# EAGLE board driver_schnell (EAGLE 5.11)
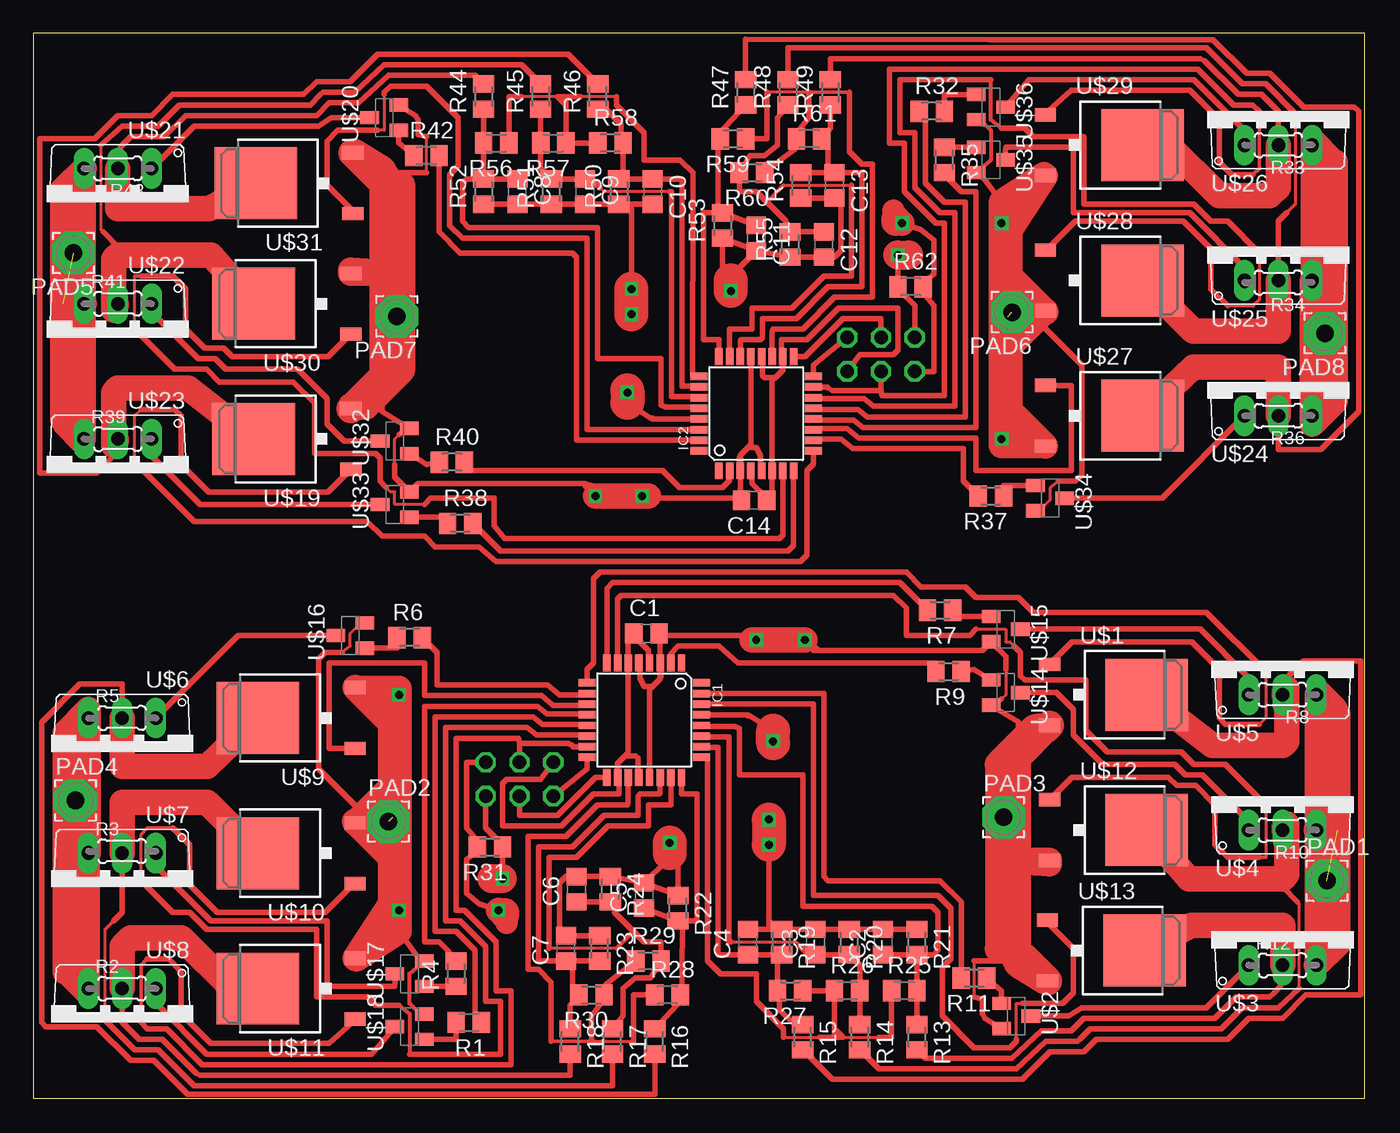
[diagram p0: board, top side]
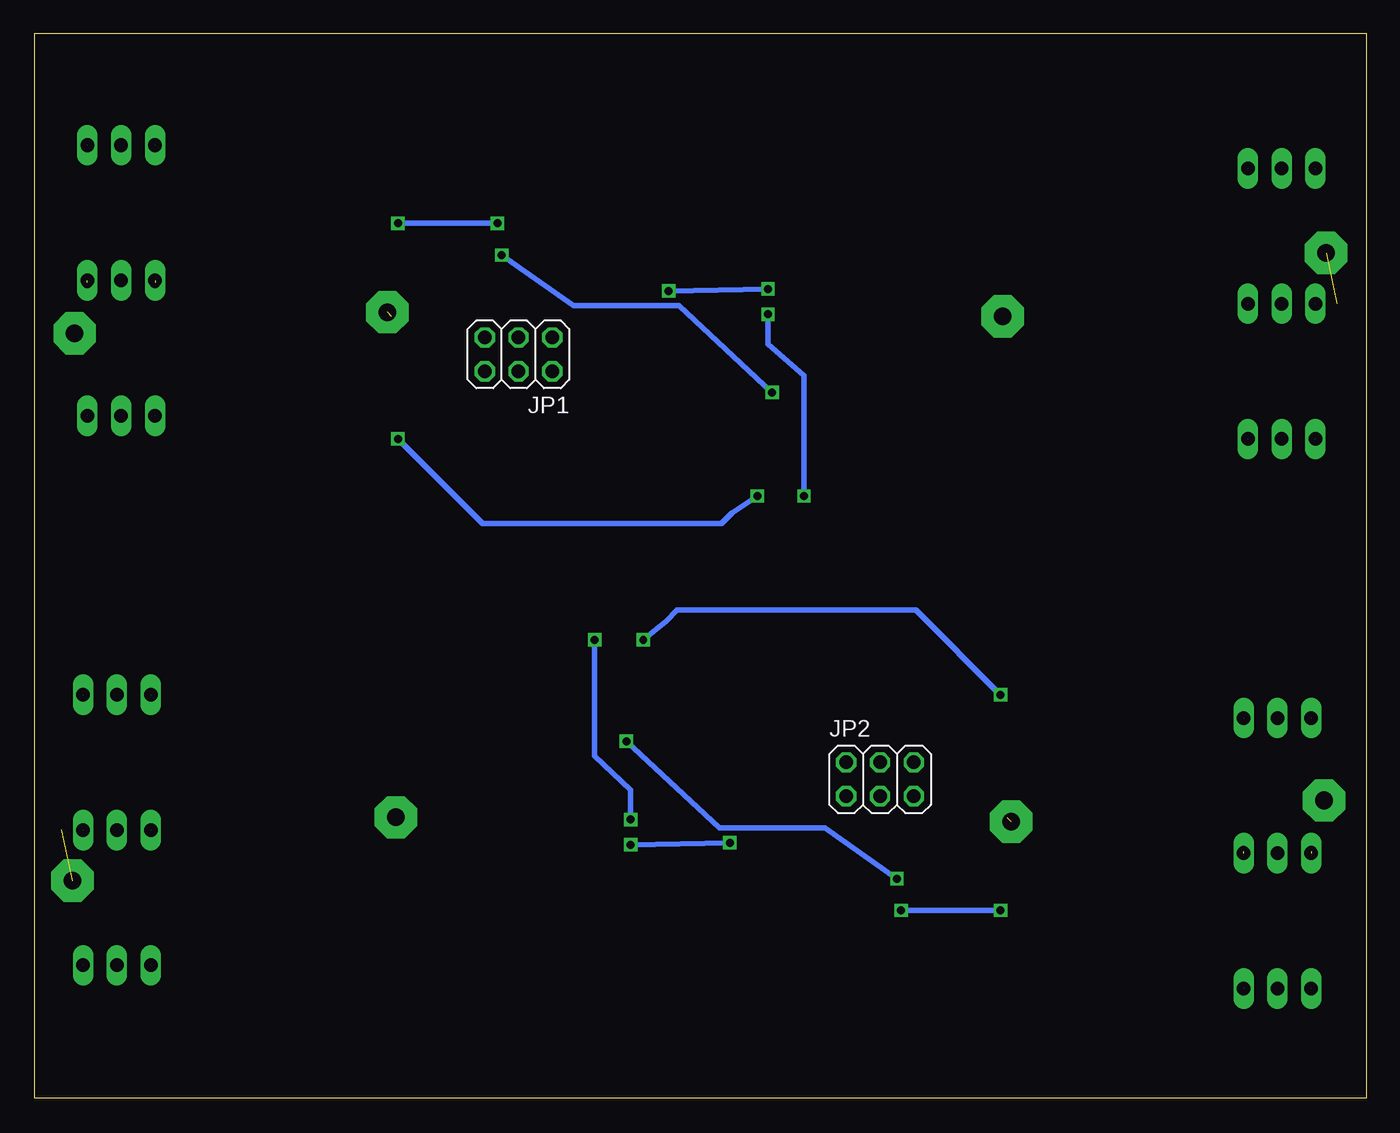
[diagram p1: board, bottom side, seen from below]

Size 100 x 80 mm. Coordinates in mm from the lower left corner, seen from the top.
Outline: 0,0 100,0 100,80 0,80 0,0
Copper layers (1*16): Top 0.035mm / dielectric 1.5mm / Bottom 0.035mm
Design rules "default": minimum track width 10mil, minimum drill 24mil, track to track 8mil, track to pad 8mil, pad to pad 8mil, via to via 8mil, smd to smd 8mil, copper to edge 40mil, drill to drill 8mil, minimum pad ring 10mil, minimum via ring 8mil, stop-mask expansion 4mil, vias tented up to drill 0mil, thermal gap 10mil

## Footprints (pad centres in the part's own frame; a part is rotated, then mirrored left to right if it is on the bottom)
C0805 = smd 1.3 x 1.5: 1 -0.95,0; 2 0.95,0
TQFP32-08 = smd 1.27 x 0.559: 1 -4.293,2.8; 2 -4.293,2; 3 -4.293,1.2; 4 -4.293,0.4; 5 -4.293,-0.4; 6 -4.293,-1.2; 7 -4.293,-2; 8 -4.293,-2.8; 17 4.293,-2.8; 18 4.293,-2; 19 4.293,-1.2; 20 4.293,-0.4; 21 4.293,0.4; 22 4.293,1.2; 23 4.293,2; 24 4.293,2.8 | smd 0.559 x 1.27: 9 -2.8,-4.293; 10 -2,-4.293; 11 -1.2,-4.293; 12 -0.4,-4.293; 13 0.4,-4.293; 14 1.2,-4.293; 15 2,-4.293; 16 2.8,-4.293; 25 2.8,4.293; 26 2,4.293; 27 1.2,4.293; 28 0.4,4.293; 29 -0.4,4.293; 30 -1.2,4.293; 31 -2,4.293; 32 -2.8,4.293
2X03 = drill 1.016 octagon: 1 -2.54,-1.27; 2 -2.54,1.27; 3 0,-1.27; 4 0,1.27; 5 2.54,-1.27; 6 2.54,1.27
3,17/1,3 = drill 1.321 pad 3.175 octagon: 1 0,0
M0805 = smd 1.3 x 1.6: 1 -0.95,0; 2 0.95,0
0204/5 = drill 0.813 octagon: 1 -2.54,0; 2 2.54,0
TO252 = smd 1 x 1.6: 1 -2.28,-4.8; 2 2.28,-4.8 | smd 5.4 x 6.2: 3 0,2.5
SOT23-BEC = smd 1 x 1.4: B -0.95,-1.1; C 0,1.1; E 0.95,-1.1
TO220V = drill 1.016 long: 1 -2.54,-2.54; 2 0,-2.54; 3 2.54,-2.54

## Placement (x,y rotation side)
C1  [C0805]  46.04,34.92 0 top
C2  [C0805]  63.82,11.75 90 top
C3  [C0805]  58.74,11.75 90 top
C4  [C0805]  53.66,11.75 90 top
C5  [C0805]  45.88,15.24 90 top
C6  [C0805]  40.8,15.72 90 top
C7  [C0805]  40.01,11.27 90 top
C8  [C0805]  36.35,68.1 270 top
C9  [C0805]  41.43,68.1 270 top
C10  [C0805]  46.51,68.1 270 top
C11  [C0805]  54.29,64.61 270 top
C12  [C0805]  59.37,64.13 270 top
C13  [C0805]  60.17,68.58 270 top
C14  [C0805]  54.13,44.93 180 top
IC1  MEGA8-AI  [TQFP32-08]  45.88,28.42 270 top
IC2  MEGA8-AI  [TQFP32-08]  54.29,51.44 90 top
JP1  ISP 1  [2X03]  63.66,55.88 180 bottom
JP2  ISP 1  [2X03]  36.51,23.97 0 bottom
PAD1  11,1V_Motor1  [3,17/1,3]  97.16,16.35 0 top
PAD2  GND  [3,17/1,3]  26.67,20.8 0 top
PAD3  GND  [3,17/1,3]  72.87,21.11 0 top
PAD4  11,1V_Motor2  [3,17/1,3]  3.18,22.38 0 top
PAD5  11,1V_Motor1  [3,17/1,3]  3.02,63.5 180 top
PAD6  GND  [3,17/1,3]  73.5,59.05 180 top
PAD7  GND  [3,17/1,3]  27.3,58.74 180 top
PAD8  11,1V_Motor2  [3,17/1,3]  97,57.47 180 top
R1  [M0805]  32.7,5.72 180 top
R2  [0204/5]  6.67,8.26 0 top
R3  [0204/5]  6.67,18.57 0 top
R4  [M0805]  31.75,9.37 90 top
R5  [0204/5]  6.67,28.57 0 top
R6  [M0805]  28.26,34.61 0 top
R7  [M0805]  68.1,36.67 180 top
R8  [0204/5]  93.82,30.32 180 top
R9  [M0805]  68.74,32.07 180 top
R10  [0204/5]  93.82,20.16 180 top
R11  [M0805]  70.64,9.05 180 top
R12  [0204/5]  93.82,10 0 top
R13  4,7k  [M0805]  66.36,4.6 270 top
R14  4,7k  [M0805]  62.07,4.6 270 top
R15  4,7k  [M0805]  57.78,4.6 270 top
R16  4,7k  [M0805]  46.67,4.29 270 top
R17  4,7k  [M0805]  43.5,4.29 270 top
R18  4,7k  [M0805]  40.32,4.29 270 top
R19  1,2k  [M0805]  56.2,11.75 270 top
R20  1,2k  [M0805]  61.28,11.75 270 top
R21  1,2k  [M0805]  66.36,11.75 270 top
R22  1,2k  [M0805]  48.42,14.29 270 top
R23  1,2k  [M0805]  42.55,11.27 270 top
R24  1,2k  [M0805]  43.34,15.72 270 top
R25  1,2k  [M0805]  65.4,8.1 0 top
R26  1,2k  [M0805]  61.12,8.1 0 top
R27  1,2k  [M0805]  56.83,8.1 180 top
R28  1,2k  [M0805]  47.62,7.78 0 top
R29  1,2k  [M0805]  46.2,10.32 0 top
R30  1,2k  [M0805]  41.91,7.78 180 top
R31  [M0805]  34.29,18.89 180 top
R32  [M0805]  67.47,74.14 0 top
R33  [0204/5]  93.5,71.6 180 top
R34  [0204/5]  93.5,61.28 180 top
R35  [M0805]  68.42,70.48 270 top
R36  [0204/5]  93.5,51.28 180 top
R37  [M0805]  71.91,45.24 180 top
R38  [M0805]  32.07,43.18 0 top
R39  [0204/5]  6.35,49.53 0 top
R40  [M0805]  31.43,47.78 0 top
R41  [0204/5]  6.35,59.69 0 top
R42  [M0805]  29.53,70.8 0 top
R43  [0204/5]  6.35,69.85 180 top
R44  4,7k  [M0805]  33.81,75.25 90 top
R45  4,7k  [M0805]  38.1,75.25 90 top
R46  4,7k  [M0805]  42.39,75.25 90 top
R47  4,7k  [M0805]  53.5,75.56 90 top
R48  4,7k  [M0805]  56.67,75.56 90 top
R49  4,7k  [M0805]  59.85,75.56 90 top
R50  1,2k  [M0805]  43.97,68.1 90 top
R51  1,2k  [M0805]  38.89,68.1 90 top
R52  1,2k  [M0805]  33.81,68.1 90 top
R53  1,2k  [M0805]  51.75,65.56 90 top
R54  1,2k  [M0805]  57.63,68.58 90 top
R55  1,2k  [M0805]  56.83,64.13 90 top
R56  1,2k  [M0805]  34.77,71.76 180 top
R57  1,2k  [M0805]  39.05,71.76 180 top
R58  1,2k  [M0805]  43.34,71.75 0 top
R59  1,2k  [M0805]  52.55,72.07 180 top
R60  1,2k  [M0805]  53.97,69.53 180 top
R61  1,2k  [M0805]  58.26,72.07 0 top
R62  [M0805]  65.88,60.96 0 top
U$1  IRLR024  [TO252]  81.12,30.32 270 top
U$2  SMTBA42  [SOT23-BEC]  73.82,6.19 270 top
U$3  IRF9Z34N  [TO220V]  93.82,12.54 0 top
U$4  IRF9Z34N  [TO220V]  93.82,22.7 0 top
U$5  IRF9Z34N  [TO220V]  93.82,32.86 0 top
U$6  IRF9Z34N  [TO220V]  6.67,26.04 180 top
U$7  IRF9Z34N  [TO220V]  6.67,15.88 180 top
U$8  IRF9Z34N  [TO220V]  6.67,5.72 180 top
U$9  IRLR024  [TO252]  19.37,28.58 90 top
U$10  IRLR024  [TO252]  19.37,18.42 90 top
U$11  IRLR024  [TO252]  19.37,8.26 90 top
U$12  IRLR024  [TO252]  81.12,20.16 270 top
U$13  IRLR024  [TO252]  80.96,11.11 270 top
U$14  SMTBA42  [SOT23-BEC]  73.03,30.48 270 top
U$15  SMTBA42  [SOT23-BEC]  73.03,35.24 270 top
U$16  SMTBA42  [SOT23-BEC]  23.81,34.77 90 top
U$17  SMTBA42  [SOT23-BEC]  28.26,9.37 90 top
U$18  SMTBA42  [SOT23-BEC]  28.26,5.4 90 top
U$19  IRLR024  [TO252]  19.05,49.53 90 top
U$20  SMTBA42  [SOT23-BEC]  26.35,73.66 90 top
U$21  IRF9Z34N  [TO220V]  6.35,67.31 180 top
U$22  IRF9Z34N  [TO220V]  6.35,57.15 180 top
U$23  IRF9Z34N  [TO220V]  6.35,46.99 180 top
U$24  IRF9Z34N  [TO220V]  93.5,53.82 0 top
U$25  IRF9Z34N  [TO220V]  93.5,63.98 0 top
U$26  IRF9Z34N  [TO220V]  93.5,74.14 0 top
U$27  IRLR024  [TO252]  80.8,51.28 270 top
U$28  IRLR024  [TO252]  80.8,61.44 270 top
U$29  IRLR024  [TO252]  80.8,71.6 270 top
U$30  IRLR024  [TO252]  19.05,59.69 90 top
U$31  IRLR024  [TO252]  19.21,68.74 90 top
U$32  SMTBA42  [SOT23-BEC]  27.15,49.37 90 top
U$33  SMTBA42  [SOT23-BEC]  27.15,44.61 90 top
U$34  SMTBA42  [SOT23-BEC]  76.36,45.08 270 top
U$35  SMTBA42  [SOT23-BEC]  71.91,70.48 270 top
U$36  SMTBA42  [SOT23-BEC]  71.91,74.45 270 top

## Library data of the parts
C1-C14 R1-R62 = rcl
IC1 IC2 = atmel; MPN: ATMEGA8-16AU; OC_FARNELL: 9171371; OC_NEWARK: 73M8863
JP1 JP2 = pinhead
PAD1-PAD8 = wirepad
U$1 U$3-U$13 U$19 U$21-U$31 = transistor-fet
U$2 U$14-U$18 U$20 U$32-U$36 = transistor-npn

## Nets
+5V: C1.1 IC1.4 IC1.6 IC1.18 IC1.20 JP2.2
+5V1: C14.1 IC2.4 IC2.6 IC2.18 IC2.20 JP1.2
+12V: PAD4.1 R2.1 R3.1 R5.1 U$6.3 U$7.3 U$8.3
+12V1: PAD8.1 R33.1 R34.1 R36.1 U$24.3 U$25.3 U$26.3
GND: C1.2 C2.2 C3.2 C4.2 C5.2 C6.2 C7.2 IC1.3 IC1.5 IC1.21 JP2.6 PAD2.1 PAD3.1 R19.1 R20.1 R21.1 R22.1 R23.1 R24.1 R31.2 U$1.2 U$2.E U$9.2 U$10.2 U$11.2 U$12.2 U$13.2 U$14.E U$15.E U$16.E U$17.E U$18.E
GND1: C8.2 C9.2 C10.2 C11.2 C12.2 C13.2 C14.2 IC2.3 IC2.5 IC2.21 JP1.6 PAD6.1 PAD7.1 R50.1 R51.1 R52.1 R53.1 R54.1 R55.1 R62.2 U$19.2 U$20.E U$27.2 U$28.2 U$29.2 U$30.2 U$31.2 U$32.E U$33.E U$34.E U$35.E U$36.E
N$1: R16.2 U$6.2 U$9.3
N$2: IC1.16 JP2.1
N$3: C5.1 IC1.24 R16.1 R22.2 R28.2
N$4: IC1.15 JP2.4 U$11.1
N$5: IC1.14 U$10.1
N$6: IC1.13 R1.1
N$7: R12.1 U$2.C U$3.1
N$8: R8.2 U$5.1 U$15.C
N$9: R10.2 U$4.1 U$14.C
N$10: R9.1 U$14.B
N$11: C6.1 IC1.23 R17.1 R24.2 R29.2
N$12: C7.1 IC1.22 R18.1 R23.2 R30.2
N$13: R7.1 U$15.B
N$14: IC1.8 R7.2
N$15: IC1.19 R28.1 R29.1 R30.1
N$16: R47.2 U$24.2 U$27.3
N$17: R2.2 U$8.1 U$18.C
N$18: R1.2 U$18.B
N$19: R18.2 U$8.2 U$11.3
N$20: R17.2 U$7.2 U$10.3
N$21: IC1.11 U$9.1
N$22: IC1.12 R4.2
N$23: IC1.10 R6.2
N$24: R13.2 U$3.2 U$13.3
N$25: IC1.9 U$1.1
N$26: R3.2 U$7.1 U$17.C
N$27: IC1.7 U$12.1
N$28: R15.2 U$1.3 U$5.2
N$29: R14.2 U$4.2 U$12.3
N$30: IC1.2 R9.2
N$31: IC1.30 U$13.1
N$32: IC1.31 R11.2
N$33: R4.1 U$17.B
N$34: R5.2 U$6.1 U$16.C
N$35: R6.1 U$16.B
N$36: R11.1 U$2.B
N$37: IC2.15 JP1.4 U$29.1
N$38: IC2.13 R32.1
N$39: IC2.14 U$28.1
N$40: IC1.17 JP2.3
N$41: R49.2 U$26.2 U$29.3
N$42: IC1.29 JP2.5 R31.1
N$43: R48.2 U$25.2 U$28.3
N$44: IC2.11 U$27.1
N$45: R44.2 U$21.2 U$31.3
N$46: IC2.9 U$19.1
N$47: IC2.7 U$30.1
N$48: R46.2 U$19.3 U$23.2
N$49: R45.2 U$22.2 U$30.3
N$50: R43.1 U$20.C U$21.1
N$51: R41.2 U$22.1 U$32.C
N$52: R40.1 U$32.B
N$53: R39.2 U$23.1 U$33.C
N$54: R38.1 U$33.B
N$55: R33.2 U$26.1 U$36.C
N$56: R32.2 U$36.B
N$57: IC2.12 R35.2
N$58: IC2.10 R37.2
N$59: R34.2 U$25.1 U$35.C
N$60: R35.1 U$35.B
N$61: R36.2 U$24.1 U$34.C
N$62: R37.1 U$34.B
N$63: R42.1 U$20.B
N$64: IC2.2 R40.2
N$65: C11.1 IC2.24 R47.1 R53.2 R59.2
N$66: C12.1 IC2.23 R48.1 R55.2 R60.2
N$67: C13.1 IC2.22 R49.1 R54.2 R61.2
N$68: IC2.19 R59.1 R60.1 R61.1
N$69: IC2.29 JP1.5 R62.1
N$70: IC2.16 JP1.1
N$71: IC2.17 JP1.3
N$72: IC2.30 U$31.1
N$73: IC2.31 R42.2
N$74: IC2.8 R38.2
VCC: PAD1.1 R8.1 R10.1 R12.2 U$3.3 U$4.3 U$5.3
VCC1: PAD5.1 R39.1 R41.1 R43.2 U$21.3 U$22.3 U$23.3
VDD: IC1.25 R25.1 R26.1 R27.1
VDD1: IC2.25 R56.1 R57.1 R58.1
VEE: C2.1 IC1.28 R13.1 R21.2 R25.2
VEE1: C8.1 IC2.28 R44.1 R52.2 R56.2
VPP: C3.1 IC1.27 R14.1 R20.2 R26.2
VPP1: C9.1 IC2.27 R45.1 R51.2 R57.2
VSS: C4.1 IC1.26 R15.1 R19.2 R27.2
VSS1: C10.1 IC2.26 R46.1 R50.2 R58.2

## Tracks (layer width: path | path; a pad name or v marks a point on that pad's centre or on a via)
+5V  (via drill 0.6)
  Top 0.406: 44.45,25.72 43.88,25.15 IC1.18 43.97,24.03 43.97,22.86 42.07,22.86 39.69,20.48 35.24,20.48 35.24,23.65 35.56,23.97 38.1,23.97 JP2.2 | 44.45,25.72 45.24,25.72 45.4,25.56 45.4,24.2 IC1.20 | 44.45,25.72 44.68,25.95 IC1.6 44.68,34.52 C1.1 45.09,34.76 46.2,33.66 46.2,32.79 IC1.4 | JP2.2
  other vias: 39.05,25.24
+5V1  (via drill 0.6)
  Top 0.406: 55.72,54.13 56.29,54.7 IC2.18 56.2,55.82 56.2,56.99 58.1,56.99 60.48,59.37 64.93,59.37 64.93,56.2 64.61,55.88 62.07,55.88 JP1.2 | 55.72,54.13 54.93,54.13 54.77,54.29 54.77,55.65 IC2.20 | 55.72,54.13 55.49,53.91 IC2.6 55.49,45.34 C14.1 55.08,45.09 53.98,46.2 53.98,47.06 IC2.4 | JP1.2 | JP1.2
  other vias: 61.12,54.61
+12V  (3 unrouted)
  Top 0.406: PAD4.1 2.38,21.59 2.38,19.68
  Top 1.778: U$8.3 U$7.3 | 2.38,10 U$8.3 | U$8.3 4.13,7.78 2.38,9.53
  Top 1.93: 2.38,26.83 R5.1 U$7.3 2.54,18.41 2.38,18.57 | 2.38,18.57 2.38,19.68 2.38,26.83 | 2.38,18.57 2.38,10 | 2.38,9.53 2.38,18.57 | 2.38,26.83 2.38,27.46 4.13,29.21 4.13,28.89
+12V1  (3 unrouted)
  Top 0.406: PAD8.1 97.79,58.26 97.79,60.17
  Top 1.778: U$26.3 U$25.3 | 97.79,69.85 U$26.3 | U$26.3 96.04,72.07 97.79,70.33
  Top 1.93: 97.79,53.02 U$24.3 U$25.3 97.63,61.44 97.79,61.28 | 97.79,61.28 97.79,60.17 97.79,53.02 | 97.79,61.28 97.79,69.85 | 97.79,70.33 97.79,61.28 | 97.79,53.02 97.79,52.39 96.04,50.64 96.04,50.96
GND  (via drill 0.6)  (1 unrouted)
  Top 0.22: 23.18,33.5 23.81,33.97 23.81,34.92 24.6,35.72 U$16.E | 70.64,10.32 70.64,7.62 | 72.71,30 73.03,30.32 73.03,32.23
  Top 0.305: U$18.E 29.68,6.35 | U$9.2 23.81,30.86 | U$17.E 28.26,9.38 28.26,7.14 28.88,6.52
  Top 0.406: C5.2 R22.1 48.42,17.78 47.78,18.41 | C5.2 R24.1 C6.2 40,16.67 39.53,16.19 39.53,12.7 C7.2 R23.1 | IC1.21 46.28,30.72 46.51,30.96 | 47.08,31.52 47.15,31.75 47.15,32.64 IC1.3 | IC1.3 47.08,31.52 | 47.08,31.52 46.51,30.96 | 46.51,30.96 45.88,30.96 45.56,31.59 45.56,32.47 IC1.5 | IC1.3 47.08,34.83 C1.2 47.15,34.77 53.5,34.77 v54.29,34.45 | 27.46,12.54 28.74,10.79 U$17.E | U$18.E 28.88,6.52 | U$9.2 26.99,30.86 26.99,21.11 25.08,21.11 21.43,24.77 21.43,33.02 21.91,33.5 23.18,33.5 | U$2.E 71.45,6.03 71.28,6.35 71.28,7.46 70.64,7.62 | 73.98,10.32 70.64,10.32 | C5.2 47.47,17.78 | R21.1 R20.1 | R20.1 C2.2 | R20.1 C3.2 R19.1 55.56,12.7 | 55.56,12.7 C4.2 | 73.98,25.56 73.98,28.27 U$14.E 72.08,29.54 72.71,30 | 73.03,32.23 73.03,33.19 U$15.E 71.29,33.66 58.58,33.66 58.74,33.81 59.05,33.66 v57.94,34.45 | 35.4,13.97 33.5,14.61 32.54,15.4 32.54,17.94 33.34,18.57 R31.2 33.34,19.36 32.54,20.32 32.54,25.24 32.7,25.24 JP2.6 | JP2.6 | 55.56,12.7 55.24,13.02 v55.24,19.05 | v34.92,14.13
  Top 1.676: 35.4,13.81 35.56,13.18
  Top 1.93: 73.98,10.26 73.98,10.32 73.98,17.78 76.32,17.62 U$12.2 73.98,17.88 73.98,25.56 76.32,27.94 U$1.2 | U$9.2 26.83,28.19 26.83,23.36 U$10.2 27.46,20.7 | 27.46,20.7 v27.46,30.32 27.46,30.8 24.45,30.8 | v27.46,14.13 27.46,13.83 U$11.2 26.83,14.62 26.83,20 26.04,20.8 24.13,20.8 27.46,17.46 v27.46,14.13 | v27.46,14.13 27.46,20.7 | v27.46,14.13 27.46,12.54 24.29,10.48 | v34.92,14.13 35.4,13.97 | v57.94,34.45 v54.29,34.45 53.98,34.45 | v55.24,19.05
  Top 2.184: 35.4,13.97 35.4,13.81 | 72.55,20.8 arc-90 PAD3.1 | 72.55,20.8 72.55,11.27 | 72.55,20.8 72.55,25.08 75.25,27.78 76.06,27.78 U$1.2 | 73.98,10.26 73.98,10.16 76.04,8.89 74.3,10.16 | 74.3,10.16 73.82,10.48 | 74.3,10.16 75.25,9.53 74.14,10.64 74.36,10.64 U$13.2
  Top 2.54: v55.24,20.95 v55.24,19.05 | v47.78,19.21 47.78,18.41
  Bottom 0.406: v27.46,14.13 v34.92,14.13 | v55.24,20.95 55.24,23.18 57.94,25.72 v57.94,34.45 | v55.24,19.05 v47.78,19.21 | v55.24,19.05 | v54.29,34.45 52.55,35.88 51.75,36.67 33.81,36.67 v27.46,30.32
  other vias: 33.97,25.24
GND1  (via drill 0.6)  (1 unrouted)
  Top 0.22: 76.99,46.35 76.36,45.88 76.36,44.93 75.57,44.13 U$34.E | 29.53,69.53 29.53,72.23 | 27.46,49.85 27.15,49.53 27.15,47.62
  Top 0.305: U$36.E 70.5,73.5 | U$27.2 76.36,49 | U$35.E 71.91,70.48 71.91,72.71 71.29,73.33
  Top 0.406: C11.2 R53.1 51.75,62.07 52.39,61.44 | C11.2 R55.1 C12.2 60.17,63.19 60.64,63.66 60.64,67.15 C13.2 R54.1 | IC2.21 53.89,49.13 53.66,48.9 | 53.09,48.33 53.02,48.1 53.02,47.21 IC2.3 | IC2.3 53.09,48.33 | 53.09,48.33 53.66,48.9 | 53.66,48.9 54.29,48.9 54.61,48.26 54.61,47.38 IC2.5 | IC2.3 53.09,45.02 C14.2 53.02,45.09 46.67,45.09 v45.72,45.24 | 72.71,67.31 71.44,69.06 U$35.E | U$36.E 71.29,73.33 | U$27.2 73.18,49 73.18,58.74 75.09,58.74 78.74,55.09 78.74,46.83 78.26,46.35 76.99,46.35 | U$20.E 28.72,73.82 28.89,73.5 28.89,72.39 29.53,72.23 | 26.19,69.53 29.53,69.53 | C11.2 52.7,62.07 | R51.1 R52.1 | R51.1 | R51.1 C8.2 | R51.1 C9.2 R50.1 44.61,67.15 | 44.61,67.15 C10.2 | 26.19,54.29 26.19,51.58 U$32.E 28.09,50.31 27.46,49.85 | 27.15,47.62 27.15,46.66 U$33.E 28.88,46.2 41.43,46.2 41.91,46.04 41.43,46.04 v42.23,45.24 | 64.77,65.88 66.67,65.25 67.63,64.45 67.63,61.91 66.83,61.28 R62.2 66.83,60.49 67.63,59.53 67.63,54.61 67.47,54.61 JP1.6 | v65.25,65.72 | JP1.6 | 44.61,67.15 44.93,66.84 v44.93,60.8
  Top 1.676: 64.77,66.04 64.61,66.67
  Top 1.93: 26.19,69.59 26.19,69.53 26.19,62.07 23.85,62.23 U$30.2 26.19,61.97 26.19,54.29 23.85,51.91 U$19.2 | U$27.2 73.34,51.66 73.34,56.49 U$28.2 72.71,59.16 | 72.71,59.16 v72.71,49.53 72.71,49.05 75.72,49.05 | v72.71,65.72 72.71,66.02 U$29.2 73.34,65.23 73.34,59.85 74.14,59.05 76.04,59.05 72.71,62.39 v72.71,65.72 | v72.71,65.72 72.71,59.16 | v72.71,65.72 72.71,67.31 75.88,69.37 | v65.25,65.72 64.77,65.88 | v42.23,45.24 v45.72,45.24 46.2,45.24 | v44.93,60.8
  Top 2.184: 64.77,65.88 64.77,66.04 | 27.62,59.05 arc-90 PAD7.1 | 27.62,59.05 27.62,68.58 | 27.62,59.05 27.62,54.77 24.92,52.07 24.11,52.07 U$19.2 | 26.19,69.59 26.19,69.69 24.13,70.96 25.88,69.69 | 25.88,69.69 26.35,69.37 | 25.88,69.69 24.92,70.33 26.04,69.22 25.81,69.22 U$31.2
  Top 2.54: v44.93,58.9 v44.93,60.8 | v52.39,60.64 52.39,61.44
  Bottom 0.406: v72.71,65.72 v65.25,65.72 | v44.93,58.9 44.93,56.67 42.23,54.29 v42.23,45.24 | v44.93,60.8 v52.39,60.64 | v44.93,60.8 | v45.72,45.24 47.62,43.97 48.42,43.18 66.36,43.18 v72.71,49.53
  other vias: 66.2,54.61
N$1
  Top 0.406: 6.67,24.92 6.67,31.11 3.49,31.11 0.64,28.26 0.64,5.71 0.95,5.4 4.76,5.4 7.3,2.86 9.05,2.86 11.59,0.32 28.42,0.32 46.67,0.32 R16.2
  Top 1.93: U$9.3 13.06,24.92 6.67,24.92 U$6.2
N$2  (via drill 0.6)
  Top 0.406: IC1.16 41.59,24.76 JP2.1 v39.05,22.76
N$3
  Top 0.406: R16.1 48.74,7.46 R28.2 48.73,7.78 48.74,9.21 | 48.74,9.21 | 48.74,9.21 48.74,13.34 | 48.74,13.34 R22.2 C5.1 | 48.74,13.34 49.85,13.34 49.85,22.86 48.68,22.86 IC1.24
N$4
  Top 0.254: 8.1,5.71 8.1,10
  Top 0.305: 8.1,10 8.57,10.48
  Top 0.406: U$11.1 24.17,5.71 23.97,5.71 22.23,4.13 13.34,4.13 11.11,6.35 11.11,9.53 10.16,10.48 8.57,10.48 | 8.1,5.71 8.57,5.24 10,5.24 12.7,2.54 35.88,2.54 35.88,8.1 34.77,8.1 34.77,11.75 32.38,14.13 31.75,14.13 31.75,27.06 36.44,27.06 36.51,26.67 | IC1.15 40.55,26.42 40.48,26.51 40.16,26.67 36.51,26.67 | 36.51,26.67 JP2.4
N$5
  Top 0.22: 8.1,16.35 8.1,19.84
  Top 0.254: 8.1,19.84 8.57,20.32
  Top 0.305: 8.57,20.32 10.48,20.32 | 27.46,6.99 28.26,6.35 28.26,3.33
  Top 0.406: U$10.1 24.07,16.14 21.91,13.97 13.81,13.97 11.75,16.03 11.75,19.05 10.48,20.32 | 8.1,16.35 10.48,13.97 11.75,13.97 13.02,12.7 21.27,12.7 21.27,7.62 25.08,7.62 25.72,6.99 27.46,6.99 | 28.26,3.33 35.08,3.33 35.08,7.3 33.97,7.3 33.97,11.43 32.07,13.34 30.96,13.34 30.96,27.86 37.07,27.86 37.78,27.3 41.5,27.3 IC1.14
N$6
  Top 0.406: R1.1 33.18,5.71 33.18,11.11 | 33.18,11.11 | 33.18,11.11 31.75,12.54 30.16,12.54 30.16,28.66 37.54,28.66 38.26,28.1 41.5,28.1 IC1.13
N$7  (1 unrouted)
  Top 0.406: U$3.1 88.11,6.83 78.74,6.83 77.79,6.19 | U$2.C 76.99,6.19 | 76.99,6.19 | 76.99,6.19 77.79,6.19 | 76.99,6.19 77.79,6.19
N$8  (1 unrouted)
  Top 0.406: U$5.1 91.28,31.59 87.63,35.24 U$15.C
N$9  (1 unrouted)
  Top 0.406: U$4.1 91.28,20.8 87.79,24.29 86.52,24.29 85.72,25.08 80.33,25.08 78.11,27.3 78.11,29.21 76.83,30.48 74.44,30.48 U$14.C
N$10
  Top 0.406: U$14.B 70.64,32.22 R9.1
N$11
  Top 0.22: 43.81,11.27 38.73,11.27
  Top 0.305: 45.09,12.54 43.81,11.27
  Top 0.406: R17.1 44.29,6.19 44.29,8.26 45.24,9.05 46.35,9.05 R29.2 47.15,11.75 45.88,11.75 43.66,13.97 | 43.66,13.97 43.66,14.76 | 43.66,14.76 R24.2 C6.1 41.12,14.76 43.66,14.76 | 43.66,13.97 45.09,12.54 | IC1.23 47.88,22.07 46.2,22.07 46.2,20.48 43.18,20.48 40.8,18.1 38.73,18.1 38.73,11.27
N$12
  Top 0.406: R18.1 40.32,6.99 R30.2 | R30.2 | R30.2 41.12,7.78 | 41.12,7.78 40.8,7.78 | 41.12,7.78 40.48,7.78 40.48,10.16 40.64,10.32 R23.2 C7.1 37.94,10.32 37.94,13.49 37.94,13.65 37.94,13.97 37.94,14.13 37.94,18.89 40.48,18.89 42.86,21.27 45.4,21.27 45.4,22.7 45.56,22.86 46.99,22.86 47.08,22.95 IC1.22
N$13
  Top 0.406: U$15.B 69.53,36.19 R7.1
N$14
  Top 0.406: R7.2 65.09,38.73 43.5,38.73 43.08,38.32 IC1.8
N$15
  Top 0.22: 42.22,4.29 45.09,4.29
  Top 0.254: 41.91,4.29 42.22,4.29 41.91,4.29 41.12,4.29 38.89,4.29
  Top 0.406: R29.1 43.81,9.21 43.02,8.57 R30.1 42.54,6.99 41.91,6.19 41.91,4.29 | R28.1 46.51,7.78 45.09,7.78 | 45.09,4.29 45.09,7.78 | 45.09,7.78 | 38.89,4.29 38.89,8.73 37.94,9.68 37.15,9.68 37.15,13.81 37.15,14.45 37.15,19.68 37.62,19.68 40.01,19.68 42.39,22.07 44.61,22.07 44.68,22.31 IC1.19
N$16
  Top 0.406: 93.5,54.93 93.5,48.74 96.68,48.74 99.54,51.59 99.54,74.14 99.22,74.45 95.41,74.45 92.87,76.99 91.12,76.99 88.58,79.53 71.75,79.53 53.5,79.54 R47.2
  Top 1.93: U$27.3 87.11,54.93 93.5,54.93 U$24.2
N$17  (1 unrouted)
  Top 0.406: U$18.C 25.4,3.33 13.02,3.33 9.37,6.99 U$8.1
N$18
  Top 0.406: R1.2 31.75,4.45 U$18.B
N$19
  Top 0.406: U$8.2 6.67,5.71 7.94,4.45 9.68,4.44 12.22,1.91 12.54,1.75 12.7,1.75 40.32,1.75 R18.2
  Top 1.93: U$11.3 14.92,8.26 11.11,12.06 7.3,12.06 6.67,11.43 U$8.2
N$20
  Top 0.22: 5.4,6.35 5.4,12.7
  Top 0.254: 5.4,12.7 6.03,13.34
  Top 0.406: 6.67,22.23 6.67,13.97 6.03,13.34 | R17.2 43.5,0.95 28.42,0.95 12.06,0.95 9.37,3.65 7.62,3.65 5.4,5.87 5.4,6.35
  Top 1.93: U$10.3 13.06,22.23 6.67,22.23 U$7.2
N$21
  Top 0.406: U$9.1 22.23,26.3 22.23,32.7 29.37,32.7 29.37,30.26 38.16,30.26 39.05,29.53 41.5,29.53 IC1.11
N$22
  Top 0.406: R4.2 31.91,10.32 30.48,11.75 29.37,11.75 29.37,29.46 37.85,29.46 38.58,28.89 41.51,28.89 IC1.12
N$23
  Top 0.406: R6.2 30.32,33.5 30.32,31.06 38.63,31.06 39.53,30.32 41.49,30.32 IC1.10
N$24
  Top 0.406: R13.2 66.99,3.02 73.5,3.02 75.72,5.08 77.95,5.08 78.9,6.03 88.74,6.03 90.33,7.62 92.87,7.62 93.19,7.94 | 93.19,7.94 | 93.19,7.94 93.66,8.41 93.66,9.84 U$3.2
  Top 1.93: U$13.3 86.95,13.02 93.82,13.02 U$3.2
N$25
  Top 0.22: 92.08,28.1 92.55,28.57 92.55,32.07
  Top 0.406: U$1.1 78.01,34.29 87,34.29 89.06,32.23 89.06,28.57 89.53,28.1 92.08,28.1 | 92.55,32.07 88.11,36.51 75.09,36.51 73.98,37.62 70.8,37.62 70.01,38.42 66.67,38.42 65.56,39.53 42.55,39.53 42.07,39.05 42.07,32.7 41.59,32.22 IC1.9
N$26  (1 unrouted)
  Top 0.406: U$17.C 27.16,8.74 27.15,8.41 22.07,8.41 22.07,13.34 13.34,13.34 9.21,17.46 U$7.1
N$27
  Top 0.22: 92.55,22.07 92.55,18.1 | 73.66,33.97 73.34,34.29 73.03,34.29 73.03,35.24 70.8,35.24
  Top 0.254: 92.55,18.1 92.08,18.1
  Top 0.406: U$12.1 78.01,24.13 85.25,24.13 85.88,23.5 87.31,23.5 88.74,22.07 88.74,19.05 89.69,18.1 92.08,18.1 | 92.55,22.07 89.53,25.08 87.15,25.08 86.2,26.04 80.64,26.04 79.06,27.62 79.06,31.43 74.45,31.43 74.14,31.75 74.14,33.5 73.66,33.97 | 73.66,33.97 | 70.8,35.24 70.33,34.77 65.56,34.77 65.56,36.83 64.61,37.78 44.13,37.78 43.88,37.53 IC1.7
N$28
  Top 0.406: U$5.2 93.82,31.27 95.41,32.86 99.69,32.86 99.69,7.78 95.57,7.78 93.82,6.03 91.28,6.03 89.69,4.45 79.85,4.45 78.9,3.49 76.36,3.49 74.3,1.43 60.01,1.43 R15.2
  Top 1.676: 94.14,30.8 93.82,30.48 U$5.2
  Top 1.93: U$1.3 88.54,26.51 93.82,26.51 94.14,26.83 94.14,30.8
N$29
  Top 0.22: 94.93,14.76 95.09,14.61 95.09,8.26
  Top 0.406: 93.82,16.51 93.82,15.88 94.93,14.76 | R14.2 63.5,2.22 73.82,2.22 76.04,4.29 78.42,4.29 78.58,4.45 79.38,5.24 89.22,5.24 90.81,6.83 93.5,6.83 95.09,8.26
  Top 1.676: 94.14,20.64 93.82,20.32 U$4.2
  Top 1.93: U$12.3 86.8,16.51 93.82,16.51 94.14,16.83 94.14,20.64
N$30
  Top 0.406: IC1.2 47.88,33.43 48.42,33.97 51.48,33.97 52.91,32.7 67.79,32.7 R9.2
N$31
  Top 0.22: 74.3,7.14 73.82,7.14 73.82,4.45
  Top 0.406: U$13.1 76.16,13.21 78.11,11.27 78.11,7.94 77.31,7.14 74.3,7.14 | 73.82,4.45 73.82,4.29 73.34,3.81 70.64,3.81 68.26,6.19 68.26,9.84 68.9,10.48 68.9,14.13 68.9,14.29 67.94,15.24 58.58,15.24 58.58,29.62 IC1.30
N$32
  Top 0.406: R11.2 69.69,14.76 68.1,16.35 59.69,16.35 59.37,16.67 59.37,30.42 IC1.31
N$33
  Top 0.406: R4.1 U$17.B
N$34  (1 unrouted)
  Top 0.406: U$16.C 15.4,34.77 R5.2
N$35
  Top 0.406: U$16.B 27.31,33.82 R6.1
N$36
  Top 0.406: R11.1 72.72,8.08 U$2.B
N$37
  Top 0.254: 92.08,74.14 92.08,69.85
  Top 0.305: 92.08,69.85 91.6,69.37
  Top 0.406: U$29.1 76,74.14 76.2,74.14 77.95,75.72 86.84,75.72 89.06,73.5 89.06,70.33 90.01,69.37 91.6,69.37 | 92.08,74.14 91.6,74.61 90.17,74.61 87.47,77.31 64.29,77.31 64.29,71.75 65.41,71.75 65.41,68.1 67.79,65.72 68.42,65.72 68.42,52.79 63.73,52.79 63.66,53.18 | IC2.15 59.63,53.44 59.69,53.34 60.01,53.18 63.66,53.18 | 63.66,53.18 JP1.4
N$38
  Top 0.406: R32.1 66.99,74.14 66.99,68.74 68.42,67.31 70.01,67.31 70.01,51.19 62.63,51.19 61.91,51.75 58.67,51.75 IC2.13
N$39
  Top 0.22: 92.08,63.5 92.08,60.01
  Top 0.254: 92.08,60.01 91.6,59.53
  Top 0.305: 91.6,59.53 89.69,59.53 | 72.71,72.87 71.91,73.5 71.91,76.52
  Top 0.406: U$28.1 76.1,63.72 78.26,65.88 86.36,65.88 88.42,63.82 88.42,60.8 89.69,59.53 | 92.08,63.5 89.69,65.88 88.42,65.88 87.15,67.15 78.9,67.15 78.9,72.23 75.09,72.23 74.45,72.87 72.71,72.87 | 71.91,76.52 65.09,76.52 65.09,72.55 66.2,72.55 66.2,68.42 68.1,66.52 69.22,66.52 69.22,51.99 63.1,51.99 62.39,52.55 58.67,52.55 IC2.14
N$40  (via drill 0.6)
  Top 0.406: JP2.3 36.51,21.27 37.31,21.27 39.37,21.27 40.01,21.91 42.23,24.13 IC1.17 | JP2.3
  other vias: 36.51,22.7
N$41
  Top 0.406: U$26.2 93.5,74.14 92.23,75.41 90.49,75.41 87.95,77.95 87.63,78.11 87.47,78.11 59.85,78.11 R49.2
  Top 1.93: U$29.3 85.25,71.6 89.06,67.79 92.87,67.79 93.5,68.42 U$26.2
N$42  (via drill 0.6)
  Top 0.406: JP2.5 | 33.97,20.32 33.97,20.95 JP2.5 | 35.24,19.05 33.97,20.32 | 35.24,19.05 R31.1 | JP2.5 | 33.97,20.32 JP2.5 | 35.24,19.05 35.24,18.1 v35.24,16.51 | IC1.29 53.66,28.82 53.66,28.73 53.82,28.73 55.56,27.62 | v55.56,26.83 55.56,26.67
  Top 2.184: v35.24,16.51 34.45,16.51
  Top 2.54: 55.56,26.67 55.56,27.62
  Bottom 0.406: v55.56,26.83 48.58,20.32 40.64,20.32 v35.24,16.51
  other vias: 33.97,22.7
N$43
  Top 0.22: 94.77,73.5 94.77,67.15
  Top 0.254: 94.77,67.15 94.14,66.52
  Top 0.406: 93.5,57.63 93.5,65.88 94.14,66.52 | R48.2 56.67,78.9 71.75,78.9 88.11,78.9 90.81,76.2 92.55,76.2 94.77,73.98 94.77,73.5
  Top 1.93: U$28.3 87.11,57.63 93.5,57.63 U$25.2
N$44
  Top 0.406: U$27.1 77.95,53.56 77.95,47.15 70.8,47.15 70.8,49.59 62.01,49.59 61.12,50.32 58.67,50.32 IC2.11
N$45
  Top 0.406: R44.2 33.18,76.83 26.67,76.83 24.45,74.77 22.23,74.77 21.27,73.82 11.43,73.82 9.84,72.23 7.3,72.23 6.99,71.91 | 6.99,71.91 | 6.99,71.91 6.51,71.44 6.51,70.01 U$21.2
  Top 1.93: U$31.3 13.22,66.83 6.35,66.83 U$21.2
N$46
  Top 0.22: 8.1,51.75 7.62,51.28 7.62,47.78
  Top 0.406: U$19.1 22.16,45.56 13.18,45.56 11.11,47.62 11.11,51.28 10.64,51.75 8.1,51.75 | 7.62,47.78 12.06,43.34 25.08,43.34 26.19,42.23 29.37,42.23 30.16,41.43 33.5,41.43 34.77,40.32 57.63,40.32 58.1,40.8 58.1,47.15 58.59,47.63 IC2.9
N$47
  Top 0.22: 7.62,57.78 7.62,61.75 | 26.51,45.88 26.83,45.56 27.15,45.56 27.15,44.61 29.37,44.61
  Top 0.254: 7.62,61.75 8.1,61.75
  Top 0.406: U$30.1 22.16,55.72 14.92,55.72 14.29,56.36 12.86,56.36 11.43,57.78 11.43,60.8 10.48,61.75 8.1,61.75 | 7.62,57.78 10.64,54.77 13.02,54.77 13.97,53.82 19.53,53.82 21.11,52.23 21.11,48.42 | 21.11,48.42 | 21.11,48.42 25.72,48.42 26.04,48.1 26.04,46.35 26.51,45.88 | 26.51,45.88 | 29.37,44.61 29.84,45.09 34.61,45.09 34.61,43.02 35.4,42.07 56.04,42.07 56.29,42.32 IC2.7
N$48
  Top 0.406: U$23.2 6.35,48.58 4.76,46.99 0.48,46.99 0.48,72.07 4.6,72.07 6.35,73.82 8.89,73.82 10.48,75.41 20.32,75.41 21.27,76.36 23.81,76.36 25.88,78.42 40.16,78.42 R46.2
  Top 1.676: 6.03,49.05 6.35,49.37 U$23.2
  Top 1.93: U$19.3 11.63,53.34 6.35,53.34 6.03,53.02 6.03,49.05
N$49
  Top 0.22: 5.24,65.09 5.08,65.25 5.08,71.6
  Top 0.406: 6.35,63.34 6.35,63.98 5.24,65.09 | R45.2 36.67,77.63 26.35,77.63 24.13,75.56 21.75,75.56 21.59,75.41 20.8,74.61 10.95,74.61 9.37,73.03 6.67,73.03 5.08,71.6
  Top 1.676: 6.03,59.21 6.35,59.53 U$22.2
  Top 1.93: U$30.3 13.38,63.34 6.35,63.34 6.03,63.02 6.03,59.21
N$50  (1 unrouted)
  Top 0.406: U$21.1 12.06,73.03 21.43,73.03 22.38,73.66 | U$20.C 23.18,73.66 | 23.18,73.66 22.38,73.66 | 23.18,73.66 22.38,73.66
N$51  (1 unrouted)
  Top 0.406: U$22.1 8.89,59.05 12.38,55.56 13.65,55.56 14.45,54.77 19.84,54.77 22.07,52.55 22.07,50.64 23.34,49.37 25.73,49.37 U$32.C
N$52
  Top 0.406: U$32.B 29.53,47.63 R40.1
N$53  (1 unrouted)
  Top 0.406: U$23.1 8.89,48.26 12.54,44.61 U$33.C
N$54
  Top 0.406: U$33.B 30.64,43.66 R38.1
N$55  (1 unrouted)
  Top 0.406: U$36.C 74.77,76.52 87.15,76.52 90.81,72.87 U$26.1
N$56
  Top 0.406: R32.2 68.42,75.4 U$36.B
N$57
  Top 0.406: R35.2 68.26,69.53 69.69,68.1 70.8,68.1 70.8,50.39 62.32,50.39 61.59,50.96 58.66,50.96 IC2.12
N$58
  Top 0.406: R37.2 69.85,46.35 69.85,48.79 61.54,48.79 60.64,49.53 58.68,49.53 IC2.10
N$59  (1 unrouted)
  Top 0.406: U$35.C 73.01,71.11 73.03,71.44 78.11,71.44 78.11,66.52 86.84,66.52 90.96,62.39 U$25.1
N$60
  Top 0.406: R35.1 U$35.B
N$61  (1 unrouted)
  Top 0.406: U$34.C 84.77,45.09 U$24.1
N$62
  Top 0.406: U$34.B 72.86,46.03 R37.1
N$63
  Top 0.406: R42.1 27.45,71.77 U$20.B
N$64
  Top 0.406: IC2.2 52.29,46.42 51.75,45.88 48.53,45.88 47.26,47.15 47.31,47.15 32.38,47.15 R40.2
N$65
  Top 0.406: R47.1 51.44,72.39 R59.2 51.44,72.08 51.44,70.64 | 51.44,70.64 | 51.44,70.64 51.43,66.52 | 51.43,66.52 R53.2 C11.1 | 51.43,66.52 50.32,66.52 50.32,56.99 51.49,56.99 IC2.24
N$66
  Top 0.22: 56.36,68.58 61.44,68.58
  Top 0.305: 55.09,67.31 56.36,68.58
  Top 0.406: R48.1 55.88,73.66 55.88,71.6 54.93,70.8 53.82,70.81 R60.2 53.02,68.1 54.29,68.1 56.52,65.88 | 56.52,65.88 56.52,65.09 | 56.52,65.09 R55.2 C12.1 59.05,65.09 56.52,65.09 | 56.52,65.88 55.09,67.31 | IC2.23 52.29,57.78 53.98,57.78 53.98,59.37 56.99,59.37 59.37,61.75 61.44,61.75 61.44,68.58
N$67
  Top 0.406: R49.1 59.85,72.86 R61.2 | R61.2 | R61.2 59.05,72.07 | 59.05,72.07 59.37,72.07 | 59.05,72.07 59.69,72.07 59.69,69.69 59.53,69.53 R54.2 C13.1 62.23,69.53 62.23,66.36 62.23,66.2 62.23,65.88 62.23,65.72 62.23,60.96 59.69,60.96 57.31,58.58 54.77,58.58 54.77,57.15 54.61,56.99 53.18,56.99 53.09,56.9 IC2.22
N$68
  Top 0.22: 57.95,75.56 55.09,75.56
  Top 0.254: 58.26,75.56 57.95,75.56 58.26,75.56 59.05,75.56 61.28,75.56
  Top 0.406: R60.1 56.36,70.64 57.15,71.28 R61.1 57.63,72.87 58.26,73.66 58.26,75.56 | R59.1 53.66,72.08 55.09,72.07 | 55.09,75.56 55.09,72.07 | 55.09,72.07 | 61.28,75.56 61.28,71.12 62.23,70.17 63.02,70.17 63.02,66.04 63.02,65.41 | 63.02,65.41 | 63.02,65.41 63.02,60.17 62.55,60.17 60.17,60.17 57.78,57.78 55.56,57.78 55.49,57.54 IC2.19
N$69  (via drill 0.6)
  Top 0.406: JP1.5 | 66.2,59.53 66.2,58.9 JP1.5 | 64.93,60.8 66.2,59.53 | 64.93,60.8 R62.1 | JP1.5 | 66.2,59.53 JP1.5 | 64.93,60.8 64.93,61.75 v64.93,63.34 | IC2.29 46.51,51.03 46.51,51.12 46.35,51.12 44.61,52.23 | v44.61,53.02 44.61,53.18
  Top 2.184: v64.93,63.34 65.72,63.34
  Top 2.54: 44.61,53.18 44.61,52.23
  Bottom 0.406: v44.61,53.02 51.59,59.53 59.53,59.53 v64.93,63.34
  other vias: 66.2,57.15
N$70  (via drill 0.6)
  Top 0.406: IC2.16 58.59,55.09 JP1.1 v61.12,57.09 | v61.12,57.09
N$71  (via drill 0.6)
  Top 0.406: JP1.3 63.66,58.58 62.87,58.58 60.8,58.58 60.17,57.94 57.94,55.72 IC2.17 | JP1.3
  other vias: 63.66,57.15
N$72
  Top 0.22: 25.88,72.71 26.35,72.71 26.35,75.41
  Top 0.406: U$31.1 24.01,66.64 22.07,68.58 22.07,71.91 22.86,72.71 25.88,72.71 | 26.35,75.41 26.35,75.56 26.83,76.04 29.53,76.04 31.91,73.66 31.91,70.01 31.27,69.37 31.27,65.72 31.27,65.56 32.23,64.61 41.59,64.61 41.59,50.23 IC2.30
N$73
  Top 0.406: R42.2 30.48,65.09 32.07,63.5 40.48,63.5 40.8,63.18 40.8,49.44 IC2.31
N$74
  Top 0.406: R38.2 35.08,41.12 56.67,41.12 57.09,41.53 IC2.8
VCC  (4 unrouted)
  Top 1.676: U$5.3 96.52,30.48
  Top 1.778: U$3.3 U$4.3 | U$4.3 U$5.3 | 97.95,20.16 U$4.3
  Top 1.93: 97.95,20.16 97.95,11.59 U$3.3 | 96.52,30.48 97.79,29.21 97.79,20.48 97.95,20.32 97.95,28.89 96.52,30.32 | U$4.3
VCC1  (4 unrouted)
  Top 1.676: U$23.3 3.65,49.37
  Top 1.778: U$21.3 U$22.3 | U$22.3 U$23.3 | 2.22,59.69 U$22.3
  Top 1.93: 2.22,59.69 2.22,68.26 U$21.3 | 3.65,49.37 2.38,50.64 2.38,59.37 2.22,59.53 2.22,50.96 3.65,49.53 | U$22.3
VDD
  Top 0.22: 60.8,4.6 | 60.8,4.6 63.5,4.6 | 60.8,4.6 60.64,4.76 | 56.36,4.6 59.05,4.6
  Top 0.406: R25.1 64.45,4.61 64.45,4.6 63.5,4.6 | 60.8,4.6 60.64,4.76 | 60.17,5.24 60.8,4.6 | 60.17,5.24 R26.1 | R26.1 | R26.1 R27.1 R26.1 | R26.1 | R26.1 | 60.17,4.6 60.17,5.24 | R26.1 | 60.17,4.6 60.8,4.6 | 59.05,4.6 60.17,4.6 | IC1.25 50.65,25.55 50.64,11.43 50.64,10.32 51.59,9.37 54.29,9.37 54.29,7.3 56.36,5.24 56.36,4.6
VDD1
  Top 0.22: 39.37,75.25 | 39.37,75.25 36.67,75.25 | 39.37,75.25 39.53,75.09 | 43.81,75.25 41.12,75.25
  Top 0.406: R56.1 35.72,75.25 36.67,75.25 | 39.37,75.25 39.53,75.09 | 40.01,74.61 39.37,75.25 | 40.01,74.61 R57.1 | R57.1 R58.1 R57.1 | R57.1 | 40.01,75.25 40.01,74.61 | R57.1 | 40.01,75.25 39.37,75.25 | 41.12,75.25 40.01,75.25 | IC2.25 49.52,54.3 49.53,68.42 49.53,69.53 48.58,70.48 45.88,70.48 45.88,72.55 43.81,74.61 43.81,75.25
VEE
  Top 0.406: R13.1 R25.2 R21.2 C2.1 67.63,10.8 67.94,11.11 67.94,13.97 67.47,14.45 57.78,14.45 57.78,24.29 53.02,24.29 53.02,27.78 52.7,27.94 50.25,27.94 IC1.28
VEE1
  Top 0.406: R44.1 R56.2 R52.2 C8.1 | C8.1 | C8.1 32.54,69.05 32.23,68.74 32.23,65.88 32.7,65.41 42.39,65.41 42.39,55.56 47.15,55.56 47.15,52.07 47.47,51.91 49.92,51.91 IC2.28
VPP
  Top 0.22: 57.63,11.43 57.31,11.75 52.39,11.75
  Top 0.406: R14.1 R26.2 62.07,10.01 R20.2 C3.1 58.26,10.8 57.63,11.43 | 52.39,11.75 52.23,11.75 52.23,27.15 50.24,27.15 IC1.27
VPP1
  Top 0.22: 42.55,68.42 42.86,68.1 47.78,68.1
  Top 0.406: R45.1 R57.2 38.1,69.84 R51.2 C9.1 41.91,69.05 42.55,68.42 | 47.78,68.1 47.94,68.1 47.94,52.7 49.93,52.7 IC2.27
VSS
  Top 0.406: R15.1 57.15,5.55 56.04,6.67 56.04,7.94 R27.2 55.88,10.8 | 55.88,10.8 R19.2 | 55.88,10.8 53.97,10.8 C4.1 52.23,10.8 51.44,10.79 51.44,26.35 50.27,26.35 IC1.26
VSS1
  Top 0.406: R46.1 43.02,74.3 44.13,73.18 44.13,71.91 R58.2 44.29,69.05 | 44.29,69.05 R50.2 | 44.29,69.05 46.2,69.05 C10.1 47.95,69.05 48.74,69.06 48.74,53.5 49.91,53.5 IC2.26